# Altium PCB PCB_3_uC.PcbDoc
Units mm, origin at the board's own origin, x right, y up, seen from the top; angles counter-clockwise.
Board outline 123 x 119.5 mm, 2 copper layers (Top Layer, Bottom Layer); 6 components, 72 nets, 132 pads, 26 vias.
Unrouted connection lines stored in the file: 3.
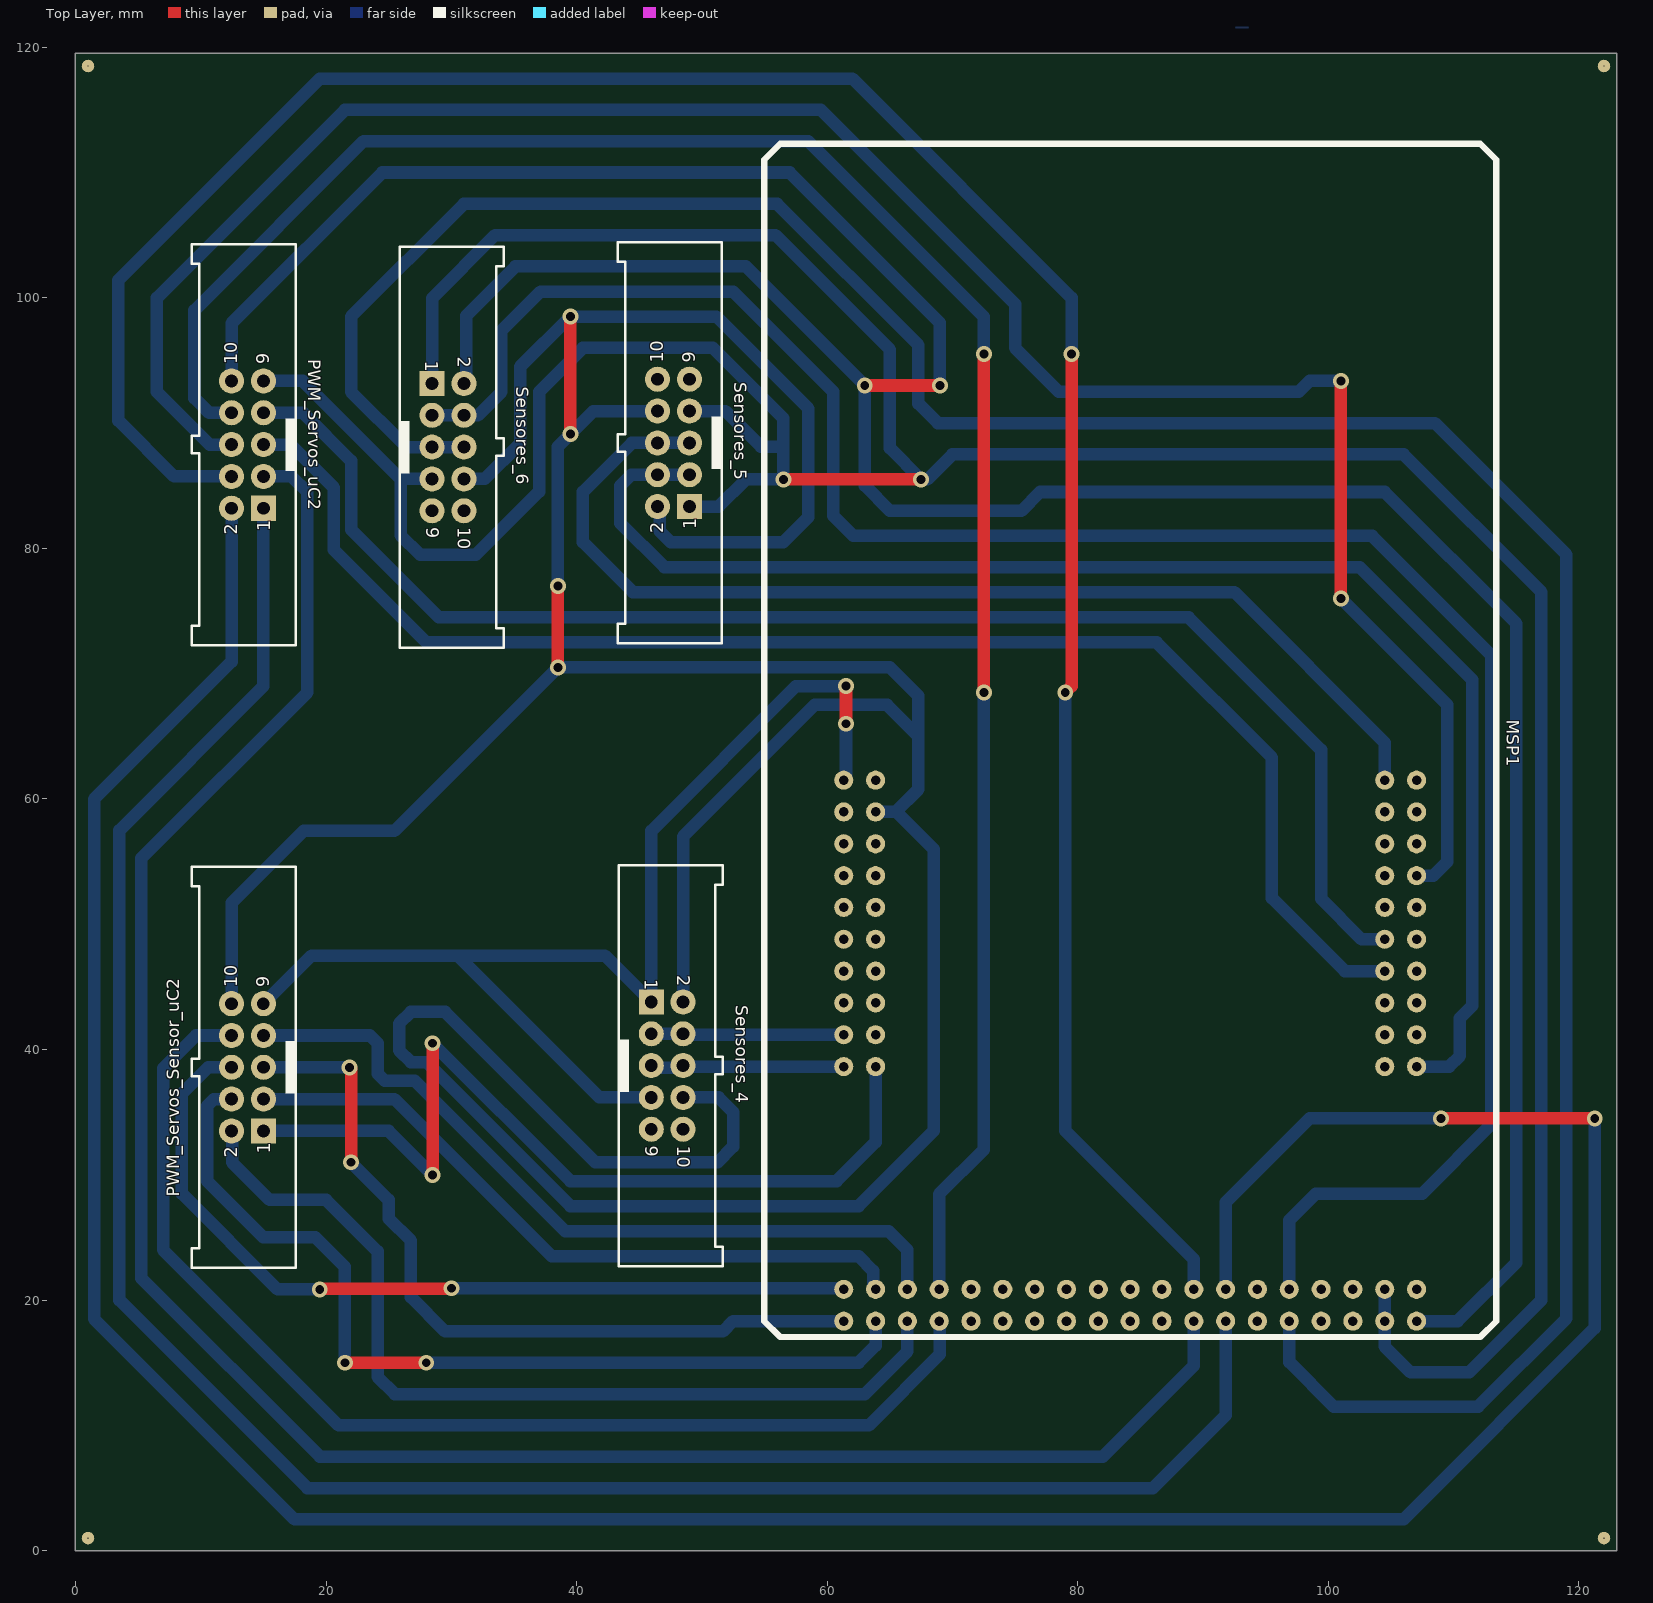
[diagram p0: Top Layer view]
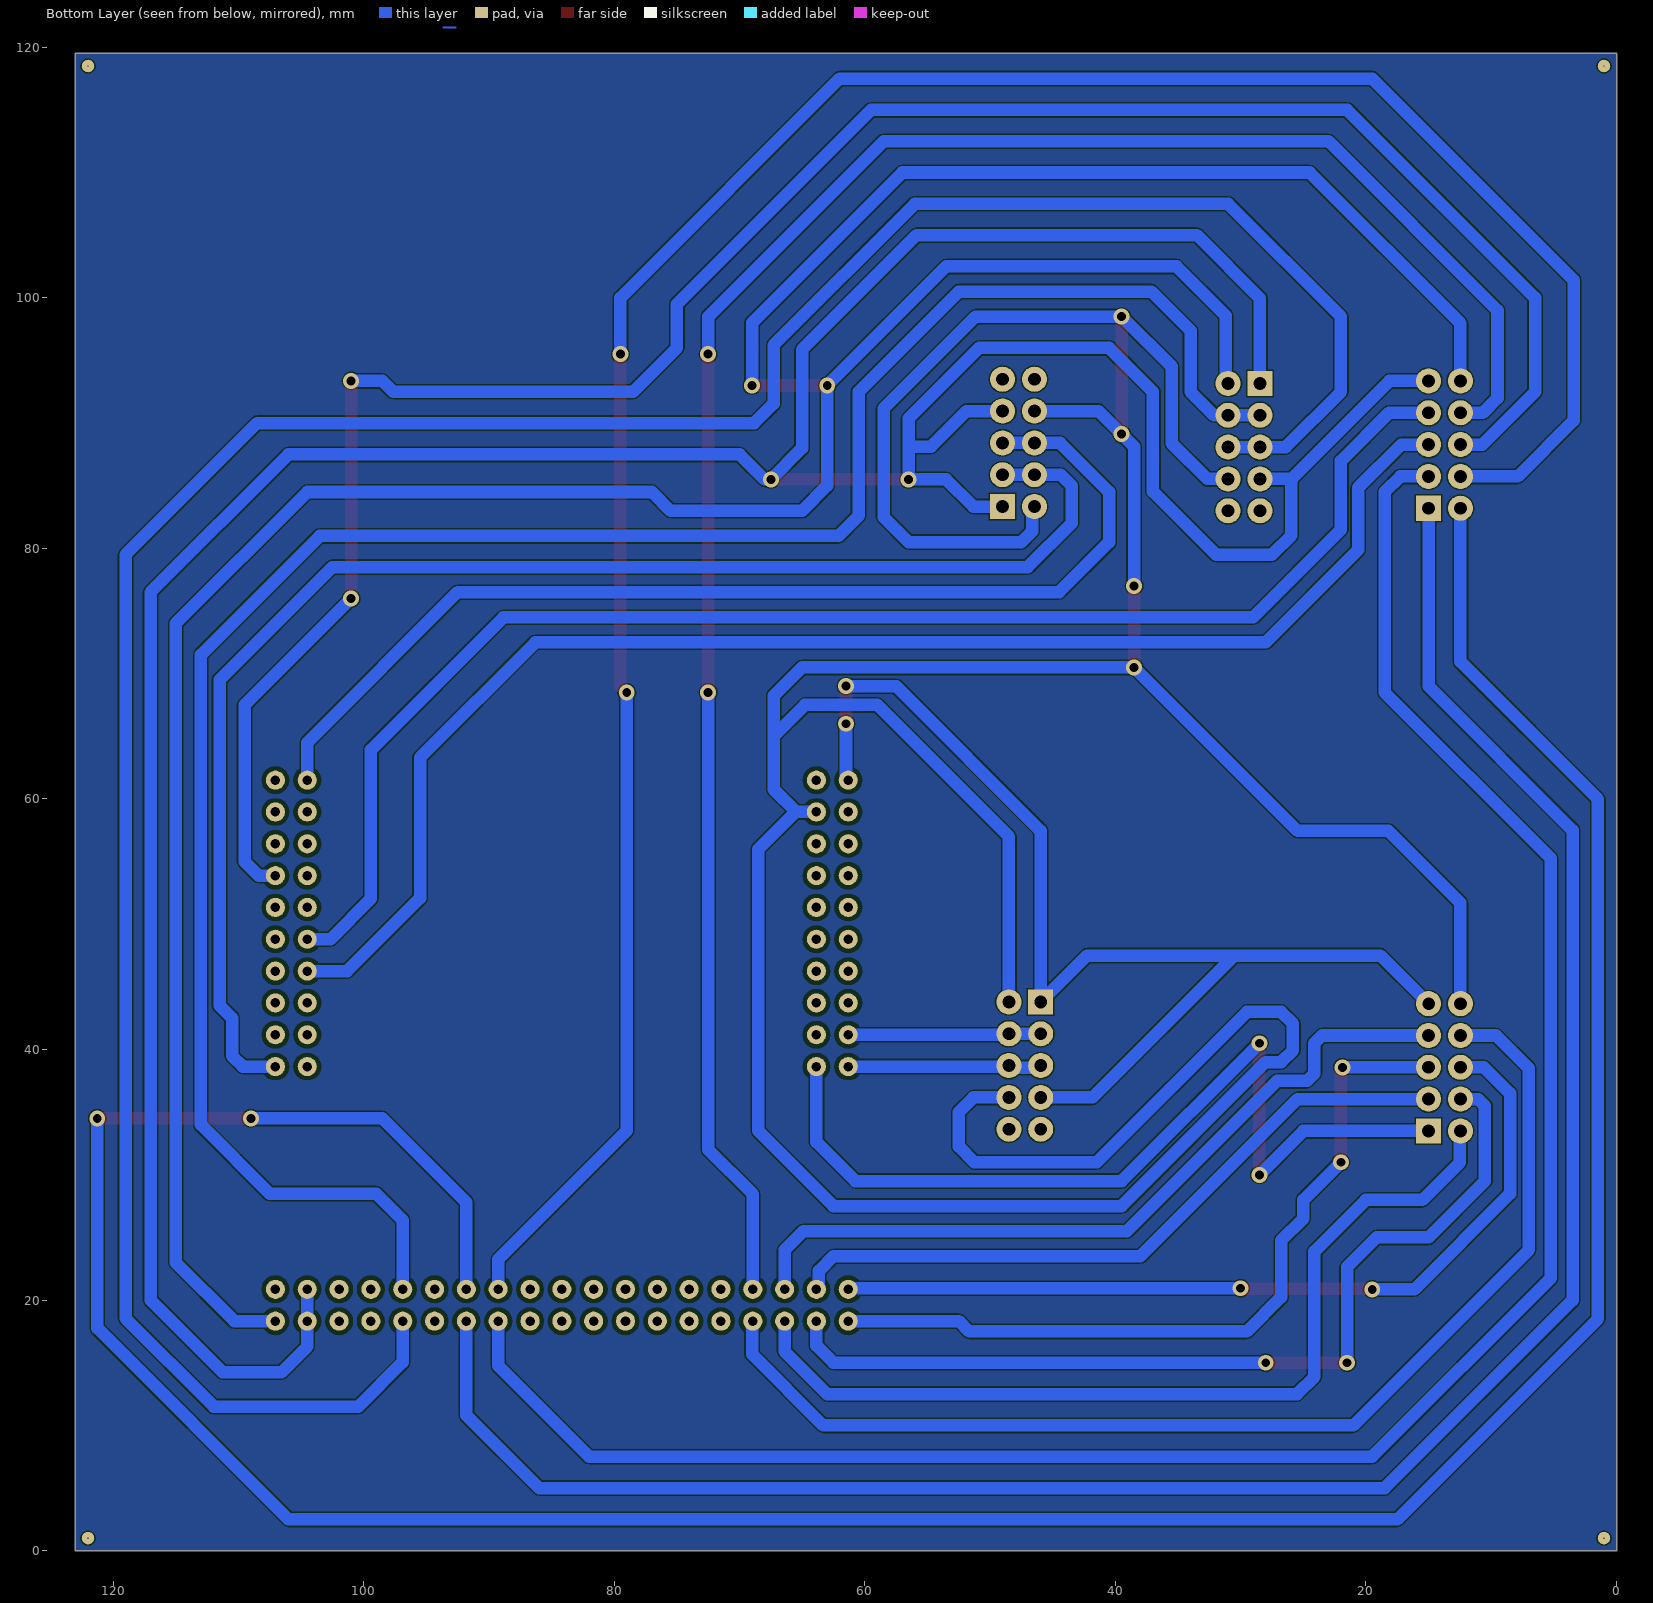
[diagram p1: Bottom Layer view, seen from below]

## Layer stack, top to bottom
Top Solder: solder mask 0.0102, Solder Resist, Dk 3.5
Top Layer: signal copper 0.0356
Dielectric 1: dielectric 0.32, FR-4, Dk 4.8
Bottom Layer: signal copper 0.0356
Bottom Solder: solder mask 0.0102, Solder Resist, Dk 3.5

## Board outline
0,0 123,0 123,119.5 0,119.5

## Design rules (kind name [scope] priority, off if disabled: settings)
Clearance [All] p1: gap=0.1 ignorepadtopadclearanceinfootprint=FALSE except(0: Arc-Hole Track-Hole SMDPad-Hole THPad-Hole Via-Hole Fill-Hole Poly-Hole Region-Hole Text-Hole; 0.254: Arc-Arc Arc-Track Arc-SMDPad Arc-THPad Arc-Via Track-Track Track-SMDPad Track-THPad Track-Via SMDPad-SMDPad SMDPad-THPad SMDPad-Via THPad-THPad THPad-Via Via-Via)
PolygonConnect [All] p1: connectstyle=Relief reliefconductorwidth=0.254 reliefentries=4 polygonreliefangle="90 Angle" airgapwidth=0.254
RoutingLayers [All] p1: top layer_v5=FALSE bottom layer_v5=TRUE
RoutingVias [All] p1: holewidth=0.711 width=1.27 viastyle="Through Hole" minholewidth=0.711 minwidth=1.27 maxholewidth=0.711 maxwidth=1.27
SolderMaskExpansion [All] p1: expansion=0.102
Width "Schematic Width Constraint_17" [InNet('GND_8V')] p1: maxlimit=1.27 minlimit=1.27 preferedwidth=1.27
Width "Schematic Width Constraint_16" [InNet('Servo_2')] p2: maxlimit=0.762 minlimit=0.762 preferedwidth=0.762
Width "Schematic Width Constraint_15" [InNet('Servo_3')] p3: maxlimit=0.762 minlimit=0.762 preferedwidth=0.762
Width "Schematic Width Constraint_14" [InNet('Servo_6')] p4: maxlimit=0.762 minlimit=0.762 preferedwidth=0.762
Width "Schematic Width Constraint_13" [InNet('Servo_4')] p5: maxlimit=0.762 minlimit=0.762 preferedwidth=0.762
Width "Schematic Width Constraint_12" [InNet('Servo_8')] p6: maxlimit=0.762 minlimit=0.762 preferedwidth=0.762
Width "Schematic Width Constraint_11" [InNet('Servo_5')] p7: maxlimit=0.762 minlimit=0.762 preferedwidth=0.762
Width "Schematic Width Constraint_10" [InNet('Servo_7')] p8: maxlimit=0.762 minlimit=0.762 preferedwidth=0.762
Width "Schematic Width Constraint_9" [InNet('VCC_8V')] p9: maxlimit=1.524 minlimit=1.27 preferedwidth=1.524
Width "Schematic Width Constraint_3" [InNet('Servo_1')] p10: maxlimit=0.762 minlimit=0.762 preferedwidth=0.762
Width [All] p11: maxlimit=2 minlimit=0.508 preferedwidth=1 minimp=50.000000 maximp=50.000000 favimp=50.000000
29 further rules are at their usual default settings.

## Components (designator, comment, footprint, x,y, rotation, side; value= is the part's Value field where it differs from the comment)
MSP1 "MSP432-support" MSP432_SUPORT 61.32,61.5 r0 top
PWM_Servos_Sensor_uC2 "61201022021" 61201022021#1 13.73,38.58 r90 top
PWM_Servos_uC2 "61201022021" 61201022021#2 13.73,88.284 r90 top
Sensores_4 "61201022021" 61201022021#3 47.23,38.716 r270 top
Sensores_5 "61201022021" 61201022021#3 47.73,88.42 r90 top
Sensores_6 "61201022021" 61201022021#3 29.73,88.08 r270 top

## Footprints (in the part's own frame and the unit in brackets; to place one, negate y for a bottom-side part, rotate by r counter-clockwise, add the part's x,y. Pads: shape width x height; smd on the part's side, far side on the other; paste and mask are expansions set on the pad)
61201022021#1 [mm] "10 pins, straight, short lever, gold plating"
  rect 2x2 hole 1.02: 1(-5.08,-1.27)
  round 2 hole 1.02: 2(-5.08,1.27) 3(-2.54,-1.27) 4(-2.54,1.27) 5(0,-1.27) 6(0,1.27) 7(2.54,-1.27) 8(2.54,1.27) 10(5.08,1.27)
  round 2 hole 1: 9(5.08,-1.27)
  silkscreen extent -16,-3.85 16,4.45, body extent -16.1,-3.85 16.1,4.45, height 24.55
61201022021#2 [mm] "10 pins, straight, short lever, gold plating"
  rect 2x2 hole 1.02: 1(-5.08,-1.27)
  round 2 hole 1.02: 2(-5.08,1.27) 3(-2.54,-1.27) 4(-2.54,1.27) 5(0,-1.27) 6(0,1.27) 7(2.54,-1.27) 8(2.54,1.27) 9(5.08,-1.27)
  round 2 hole 1.02 paste+0: 10(5.08,1.27)
  silkscreen extent -16,-3.85 16,4.45, body extent -16.1,-3.85 16.1,4.45, height 24.55
61201022021#3 [mm] "10 pins, straight, short lever, gold plating"
  rect 2x2 hole 1.02: 1(-5.08,-1.27)
  round 2 hole 1.02: 2(-5.08,1.27) 3(-2.54,-1.27) 4(-2.54,1.27) 5(0,-1.27) 6(0,1.27) 7(2.54,-1.27) 8(2.54,1.27) 9(5.08,-1.27) 10(5.08,1.27)
  silkscreen extent -16,-3.85 16,4.45, body extent -16.1,-3.85 16.1,4.45, height 24.55
MSP432_SUPORT [mil]
  round 60 hole 30: 1(0,0) 2(0,-100) 3(0,-200) 4(0,-300) 5(0,-400) 6(0,-500) 7(0,-600) 8(0,-700) 9(0,-800) 10(0,-900) 11(1800,-900) 12(1800,-800) 13(1800,-700) 14(1800,-600) 15(1800,-500) 16(1800,-400) 17(1800,-300) 18(1800,-200) 19(1800,-100) 20(1800,0) 21(100,0) 22(100,-100) 23(100,-200) 24(100,-300) 25(100,-400) 26(100,-500) 27(100,-600) 28(100,-700) 29(100,-800) 30(100,-900) 31(1700,-900) 32(1700,-800) 33(1700,-700) 34(1700,-600) 35(1700,-500) 36(1700,-400) 37(1700,-300) 38(1700,-200) 39(1700,-100) 40(1700,0) 41(0,-1700) 42(100,-1700) 43(200,-1700) 44(300,-1700) 45(400,-1700) 46(500,-1700) 47(600,-1700) 48(700,-1700) 49(800,-1700) 50(900,-1700) 51(1000,-1700) 52(1100,-1700) 53(1200,-1700) 54(1300,-1700) 55(1400,-1700) 56(1500,-1700) 57(1600,-1700) 58(1700,-1700) 59(1800,-1700) 60(0,-1600) 61(100,-1600) 62(200,-1600) 63(300,-1600) 64(400,-1600) 65(500,-1600) 66(600,-1600) 67(700,-1600) 68(800,-1600) 69(900,-1600) 70(1000,-1600) 71(1100,-1600) 72(1200,-1600) 73(1300,-1600) 74(1400,-1600) 75(1500,-1600) 76(1600,-1600) 77(1700,-1600) 78(1800,-1600)
  silkscreen extent -250,-1750 2050,2000, body extent -250,-1750 2050,2000, height 587

## Part data
MSP1: library part U*
PWM_Servos_Sensor_uC2 PWM_Servos_uC2 Sensores_4 Sensores_5 Sensores_6: "Male Box Header WR-BHD with lever, THT, Vertical, pitch 2.54 mm, 10 pins", Contact Resistance="20 mOhm", Operating Temperature="-40 to 125 degC", Withstanding Voltage="500 VAC", Working Voltage="250 VAC", ComponentLink1Description=Manufacturer, ComponentLink1URL=http://www.we-online.de, ComponentLink2Description=Datasheet, ComponentLink2URL=https://katalog.we-online.de/em/datasheet/6120xx22021.pdf, Gender=Male, Mounting Technology=THT, Orientation=Vertical, Packaging=Tray, Part Number=61201022021, Pin Number=10, Pitch="2.54 mm", Published Date="August 2018", Publisher="Wurth Elektronik"

## Free pads (board coordinates)
  round 1 hole 0.1: 1(1,1) 1(1,118.5) 1(122,1) 1(122,118.5)

## Via types
v1: diameter 1.27, hole 0.711, Top Layer to Bottom Layer, 26 vias

## Nets (pads, with @x,y where several pads share a name; then routed paths per layer and width w, separated by ;. In a path a pad name is that pad's centre, name@x,y a point inside that pad or via, vN(x,y) a via of type N, cw(c..) or ccw(c..) an arc to the next point about the centre after c; other vN are vias at no path point)
3V3_uC: MSP1.1 MSP1.58 MSP1.77 PWM_Servos_Sensor_uC2.9 PWM_Servos_uC2.9 Sensores_4.1 Sensores_4.7 Sensores_5.1 Sensores_5.7 Sensores_6.1 Sensores_6.7 | length 387.2
  Top Layer w1: v1(56.5,85.5) v1(67.5,85.5) ; v1(61.5,66) v1(61.5,69)
  Bottom Layer w1: PWM_Servos_Sensor_uC2.9 18.84,47.5 30.5,47.5 ; PWM_Servos_uC2.9 18.136,93.364 25.96,85.54 ; Sensores_6.7 25.96,85.54 ; Sensores_6.1 28.46,99.96 33.5,105 55.86,105 65,95.86 65,88 v1(67.5,85.5) 68,85.5 70,87.5 106,87.5 117,76.5 117,20 111.234,14.234 106.566,14.234 104.5,16.3 MSP1.58 MSP1.77 ; Sensores_4.7 41.824,36.176 30.5,47.5 ; Sensores_5.1 51.34,83.34 53.5,85.5 v1(56.5,85.5) 56.5,88.12 ; Sensores_5.7 51.876,90.96 54.716,88.12 56.5,88.12 ; MSP1.1 61.5,61.68 v1(61.5,66) ; v1(61.5,69) 57.5,69 45.96,57.46 Sensores_4.1 42.256,47.5 30.5,47.5 ; 25.96,85.54 25.96,81.04 27.5,79.5 31.96,79.5 37,84.54 37,92.5 40.5,96 50.866,96 56.5,90.366 56.5,88.12
"ADD 2": MSP1.20 MSP1.22 MSP1.59 PWM_Servos_Sensor_uC2.10 PWM_Servos_uC2.10 Sensores_4.2 Sensores_4.8 Sensores_5.2 Sensores_5.8 Sensores_6.2 Sensores_6.8 | length 590.9
  Top Layer w1: v1(38.5,70.5) v1(38.5,77) ; v1(39.5,89.12) v1(39.5,98.5) ; v1(63,93) v1(69,93)
  Bottom Layer w1: PWM_Servos_Sensor_uC2.10 12.46,51.706 18.214,57.46 25.46,57.46 v1(38.5,70.5) 65,70.5 67.273,68.227 67.273,65 ; PWM_Servos_uC2.10 12.46,97.968 24.492,110 57,110 69,98 v1(69,93) ; Sensores_6.8 32.66,85.54 35.5,88.38 35.5,94.5 v1(39.5,98.5) 51.16,98.5 58.5,91.16 58.5,82.5 56.5,80.5 47.5,80.5 46.651,81.349 46.651,83.149 Sensores_5.2 ; Sensores_6.2 31.191,93.351 31.191,98.571 35.12,102.5 53.5,102.5 v1(63,93) 63,85 65,83 75.5,83 77,84.5 104.5,84.5 115,74 115,23 110.32,18.32 MSP1.59 MSP1.59@107.231,18.511 ; v1(38.5,77) 38.5,88.12 v1(39.5,89.12) 41.34,90.96 Sensores_5.8 ; Sensores_4.8 51.324,36.176 52.5,35 52.5,32.254 51.246,31 41.5,31 29.5,43 26.762,43 25.828,42.066 25.828,39.934 26.762,39 28,39 39.5,27.5 62.5,27.5 68.5,33.5 68.5,56 65.54,58.96 65.46,58.96 ; Sensores_4.2 48.5,57 59,67.5 64.773,67.5 67.273,65 ; MSP1.22 65.46,58.96 ; 65.46,58.96 67.273,60.773 67.273,65
DBG0: MSP1.31
DBG1: MSP1.32
DBG2: MSP1.33
"GND (SENSOR)": 
GND_8V: 
I2C1-SCL: MSP1.9 Sensores_4.3 Sensores_4.4 | length 15.5
  Bottom Layer w1: Sensores_4.3 Sensores_4.4 ; Sensores_4.4@48.344,41.18 MSP1.9
I2C1-SDA: MSP1.10 Sensores_4.5 Sensores_4.6 | length 15.5
  Bottom Layer w1: Sensores_4.5@45.804,38.56 Sensores_4.6@48.344,38.56 ; Sensores_4.6@48.344,38.64 MSP1.10
I2C2-SCL: MSP1.40 Sensores_5.5 Sensores_5.6 | length 87.8
  Bottom Layer w1: Sensores_5.5 Sensores_5.6 44.42,88.42 40.5,84.5 40.5,80.5 44.5,76.5 92.5,76.5 104.5,64.5 MSP1.40
I2C2-SDA: MSP1.11 Sensores_5.3 Sensores_5.4 | length 116.3
  Bottom Layer w1: Sensores_5.3 Sensores_5.4 44.38,85.88 43.5,85 43.5,82 47,78.5 102.5,78.5 111.5,69.5 111.5,43.5 110.5,42.5 110.5,39.5 109.64,38.64 MSP1.11
I2C3-SCL: MSP1.55 Sensores_6.5 Sensores_6.6 | length 222.6
  Bottom Layer w1: Sensores_6.6 Sensores_6.5 26.42,88.08 22,92.5 22,98.5 31,107.5 56,107.5 67.273,96.227 67.273,91.551 68.824,90 108.5,90 119,79.5 119,18.54 111.96,11.5 100.42,11.5 96.88,15.04 MSP1.55
I2C3-SDA: MSP1.74 Sensores_6.3 Sensores_6.4 | length 171.6
  Bottom Layer w1: Sensores_6.3 Sensores_6.4 32.12,90.62 34,92.5 34,97.38 37.12,100.5 52.5,100.5 60.5,92.5 60.5,82.586 62.086,81 103.5,81 113,71.5 113,34 107.5,28.5 99,28.5 96.88,26.38 MSP1.74
NetQ1_1: 
NetQ1_2: 
NetQ2_1: 
NetQ2_2: 
NetQ3_1: 
NetQ3_2: 
NetQ4_1: 
NetQ4_2: 
NetQ5_1: 
NetQ5_2: 
NetQ6_1: 
NetQ6_2: 
NetQ7_1: 
NetQ7_2: 
NetQ8_1: 
NetQ8_2: 
NetR1_1: 
NetR2_1: 
NetR3_1: 
NetR4_1: 
NetR9_1: 
NetR10_1: 
NetR11_1: 
NetR12_1: 
NetR17_1: 
NetR18_1: 
NetR19_1: 
NetR20_1: 
NetR25_1: 
NetR26_1: 
NetR27_1: 
NetR28_1: 
PWM_Servo_1: MSP1.53 PWM_Servos_uC2.1 | length 172.4
  Bottom Layer w1: PWM_Servos_uC2.1 15,69 3.5,57.5 3.5,20 18.5,5 86,5 91.8,10.8 MSP1.53
PWM_Servo_2: MSP1.72 PWM_Servos_uC2.2 | length 257.9
  Top Layer w1: v1(109,34.5) v1(121.259,34.5)
  Bottom Layer w1: PWM_Servos_uC2.2 12.46,70.96 1.491,59.991 1.491,18.509 17.5,2.5 106,2.5 121.259,17.759 v1(121.259,34.5) ; MSP1.72 91.8,27.8 98.5,34.5 v1(109,34.5)
PWM_Servo_3: MSP1.52 PWM_Servos_uC2.3 | length 168.7
  Bottom Layer w1: PWM_Servos_uC2.3 17.256,85.744 18.5,84.5 18.5,68.5 5.246,55.246 5.246,21.754 19.5,7.5 82,7.5 89.26,14.76 MSP1.52
PWM_Servo_4: MSP1.71 PWM_Servos_uC2.4 | length 195.7
  Top Layer w1: v1(79,68.5) 79.5,69 v1(79.5,95.5)
  Bottom Layer w1: PWM_Servos_uC2.4 7.876,85.744 3.414,90.206 3.414,101.414 19.5,117.5 62,117.5 79.5,100 v1(79.5,95.5) ; v1(79,68.5) 79,33.5 89.26,23.24 MSP1.71
PWM_Servo_5: MSP1.34 PWM_Servos_uC2.5 | length 116.4
  Bottom Layer w1: PWM_Servos_uC2.5 17.176,88.284 20.622,84.838 20.622,79.878 28,72.5 86.3,72.5 95.5,63.3 95.5,52.086 101.326,46.26 MSP1.34
PWM_Servo_6: MSP1.17 PWM_Servos_uC2.6 | length 172.6
  Top Layer w1: v1(101,76) v1(101,93.364)
  Bottom Layer w1: PWM_Servos_uC2.6 10.716,88.284 6.5,92.5 6.5,100 21.5,115 59.5,115 75,99.5 75,96 78.5,92.5 97.636,92.5 98.5,93.364 v1(101,93.364) ; v1(101,76) 109.5,67.5 109.5,55 108.38,53.88 MSP1.17 ; MSP1.17 107.04,53.908 107.012,53.88 MSP1.17
PWM_Servo_7: MSP1.35 PWM_Servos_uC2.7 | length 117.1
  Bottom Layer w1: PWM_Servos_uC2.7 18.155,90.824 22,86.979 22,81.5 29,74.5 88.84,74.5 99.42,63.92 99.42,52.04 102.66,48.8 MSP1.35
PWM_Servo_8: MSP1.63 PWM_Servos_uC2.8 | length 163.9
  Top Layer w1: v1(72.5,68.5) v1(72.5,95.5)
  Bottom Layer w1: PWM_Servos_uC2.8 10.676,90.824 9.5,92 9.5,99 23,112.5 58.48,112.5 72.5,98.48 v1(72.5,95.5) ; MSP1.63 68.94,28.46 72.5,32.02 v1(72.5,68.5)
Sensor_Servo_1: MSP1.30 PWM_Servos_Sensor_uC2.1 | length 72.7
  Top Layer w1: v1(28.5,30) v1(28.5,40.5)
  Bottom Layer w1: PWM_Servos_Sensor_uC2.1 25,33.5 v1(28.5,30) ; v1(28.5,40.5) 39.5,29.5 60.746,29.5 63.86,32.614 MSP1.30
Sensor_Servo_2: MSP1.43 PWM_Servos_Sensor_uC2.2 | length 73.8
  Bottom Layer w1: PWM_Servos_Sensor_uC2.2 12.5,33.46 12.5,31 15.5,28 20,28 24.119,23.881 24.119,13.881 25.5,12.5 63,12.5 66.4,15.9 MSP1.43
Sensor_Servo_3: MSP1.61 PWM_Servos_Sensor_uC2.3 | length 55.9
  Bottom Layer w1: PWM_Servos_Sensor_uC2.3 25.46,36.04 38,23.5 62.5,23.5 63.669,22.331 63.669,21.051 MSP1.61
Sensor_Servo_4: MSP1.42 PWM_Servos_Sensor_uC2.4 | length 74.6
  Top Layer w1: v1(21.5,15) v1(28,15)
  Bottom Layer w1: PWM_Servos_Sensor_uC2.4 11.04,36.04 10.5,35.5 10.5,29.5 15,25 19.143,25 21.5,22.643 v1(21.5,15) ; v1(28,15) 62.5,15 63.86,16.36 MSP1.42
Sensor_Servo_5: MSP1.41 PWM_Servos_Sensor_uC2.5 | length 63.3
  Top Layer w1: v1(21.88,38.58) 22,38.46 v1(22,31)
  Bottom Layer w1: PWM_Servos_Sensor_uC2.5 v1(21.88,38.58) ; v1(22,31) 25,28 25,26.5 26.762,24.738 26.762,20.238 29.5,17.5 51.68,17.5 52.5,18.32 MSP1.41
Sensor_Servo_6: MSP1.60 PWM_Servos_Sensor_uC2.6 | length 68.9
  Top Layer w1: v1(19.5,20.86) 19.544,20.904 29.956,20.904 v1(30,20.948)
  Bottom Layer w1: PWM_Servos_Sensor_uC2.6 10.58,38.58 8.5,36.5 8.5,28.5 16.14,20.86 v1(19.5,20.86) ; v1(30,20.948) 61.232,20.948 MSP1.60
Sensor_Servo_7: MSP1.62 PWM_Servos_Sensor_uC2.7 | length 63
  Bottom Layer w1: PWM_Servos_Sensor_uC2.7 23.5,41.12 24.119,40.501 24.119,38.086 24.705,37.5 27.08,37.5 39.08,25.5 64.9,25.5 66.4,24 MSP1.62
Sensor_Servo_8: MSP1.44 PWM_Servos_Sensor_uC2.8 | length 93.8
  Bottom Layer w1: PWM_Servos_Sensor_uC2.8 9.62,41.12 7,38.5 7,24 21,10 63.32,10 69,15.68 MSP1.44@69,18.32
Servo_1: 
Servo_2: 
Servo_3: 
Servo_4: 
Servo_5: 
Servo_6: 
Servo_7: 
Servo_8: 
"VCC  (SENSOR)": 
VCC_8V: 
VCC_uC: 
pads on no net: MSP1.2 MSP1.3 MSP1.4 MSP1.5 MSP1.6 MSP1.7 MSP1.8 MSP1.12 MSP1.13 MSP1.14 MSP1.15 MSP1.16 MSP1.18 MSP1.19 MSP1.21 MSP1.23 MSP1.24 MSP1.25 MSP1.26 MSP1.27 MSP1.28 MSP1.29 MSP1.36 MSP1.37 MSP1.38 MSP1.39 MSP1.45 MSP1.46 MSP1.47 MSP1.48 MSP1.49 MSP1.50 MSP1.51 MSP1.54 MSP1.56 MSP1.57 MSP1.64 MSP1.65 MSP1.66 MSP1.67 MSP1.68 MSP1.69 MSP1.70 MSP1.73 MSP1.75 MSP1.76 MSP1.78 Sensores_4.9 Sensores_4.10 Sensores_5.9 Sensores_5.10 Sensores_6.9 Sensores_6.10

## Polygon pours and split planes (outlines as drawn)
no net on My_Negativ_Layer (solid): 0,119.5 123,119.5 123,0 0,0
no net on Bottom Layer "Bottom Layer-No Net" (solid, pour order 22): 0,119.5 123,119.5 123,0 0,0

## Other copper
Bottom Layer:
  text "MSP432P401r -  / Interface with Robot_ARM v2.0" at 71.5,122 h1.52

## Dimensions
0,0 to 123,0 on Top Overlay
123,119.5 to 123,0 on Top Overlay

## Text inside footprints (layer, text, board x,y; h text height)
PWM_Servos_Sensor_uC2: Top Overlay "2" at 12.93,31.38 h1.02 r90; Top Overlay "10" at 12.93,44.98 h1.02 r90; Top Overlay "1" at 15.53,31.68 h1.02 r90; Top Overlay "9" at 15.47,44.98 h1.02 r90
PWM_Servos_uC2: Top Overlay "9" at 15.47,94.684 h1.02 r90; Top Overlay "1" at 15.53,81.384 h1.02 r90; Top Overlay "10" at 12.93,94.684 h1.02 r90; Top Overlay "2" at 12.93,81.084 h1.02 r90
Sensores_4: Top Overlay "9" at 45.49,32.316 h1.02 r270; Top Overlay "1" at 45.43,45.616 h1.02 r270; Top Overlay "10" at 48.03,32.316 h1.02 r270; Top Overlay "2" at 48.03,45.916 h1.02 r270
Sensores_5: Top Overlay "9" at 49.47,94.82 h1.02 r90; Top Overlay "1" at 49.53,81.52 h1.02 r90; Top Overlay "10" at 46.93,94.82 h1.02 r90; Top Overlay "2" at 46.93,81.22 h1.02 r90
Sensores_6: Top Overlay "9" at 27.99,81.68 h1.02 r270; Top Overlay "1" at 27.93,94.98 h1.02 r270; Top Overlay "10" at 30.53,81.68 h1.02 r270; Top Overlay "2" at 30.53,95.28 h1.02 r270